# Altium PCB PMOD_DPOT.PcbDoc
Units mm, origin at the board's own origin, x right, y up, seen from the top; angles counter-clockwise.
Board outline 30 x 20 mm, 2 copper layers (Top Layer, Bottom Layer); 7 components, 8 nets, 26 pads, 1 vias.
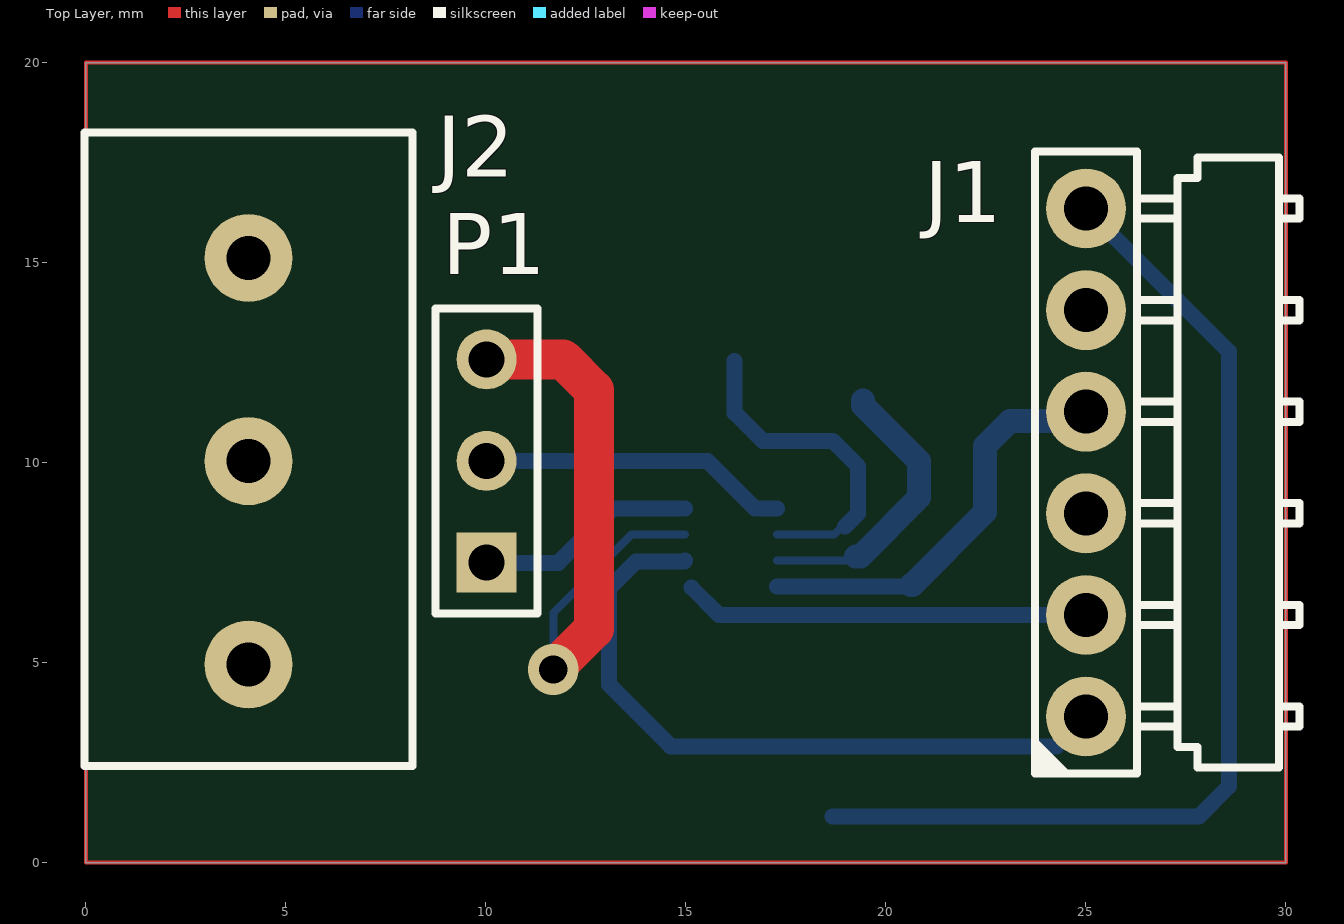
[diagram p0: Top Layer view]
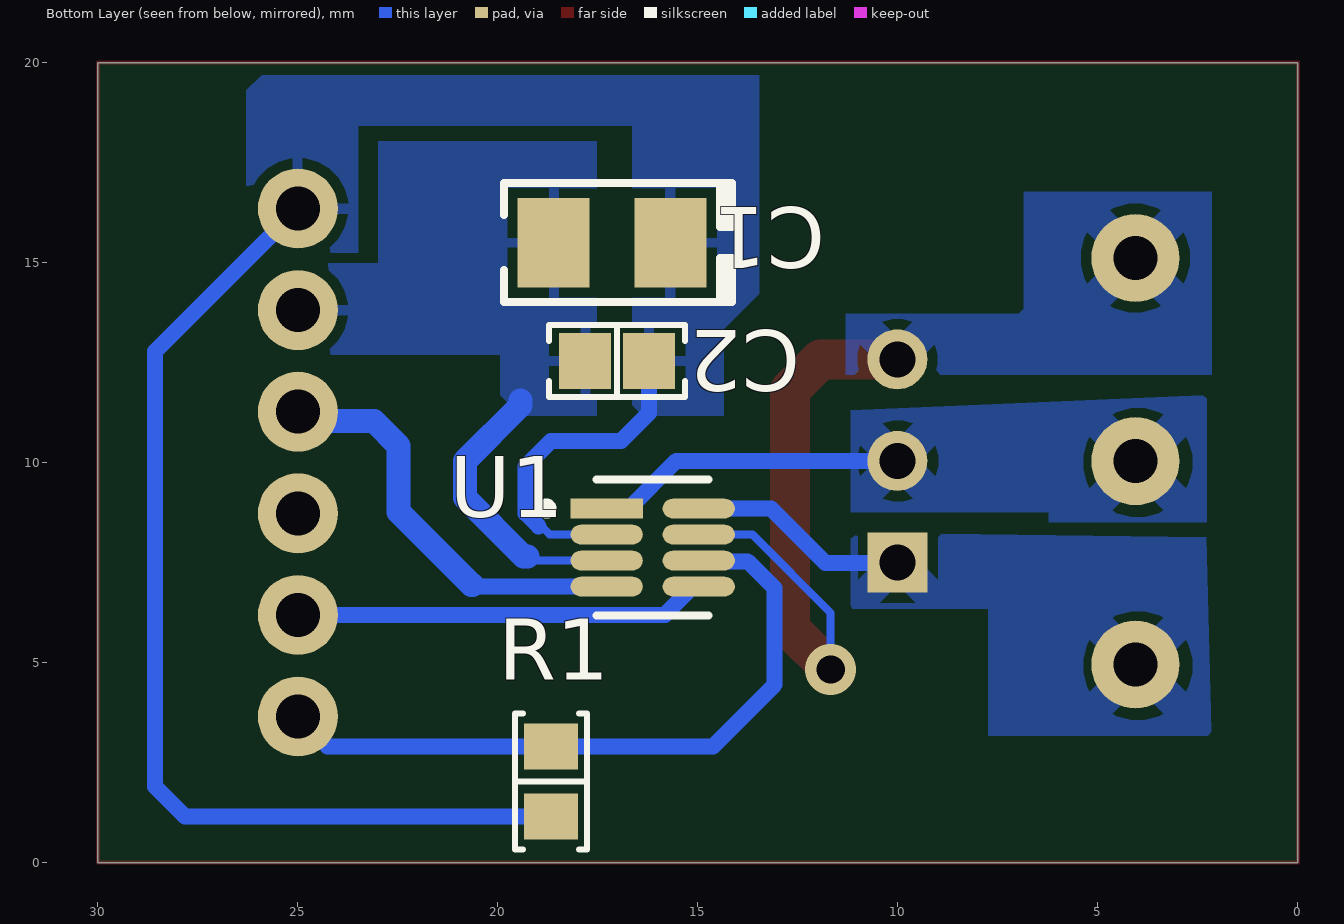
[diagram p1: Bottom Layer view, seen from below]
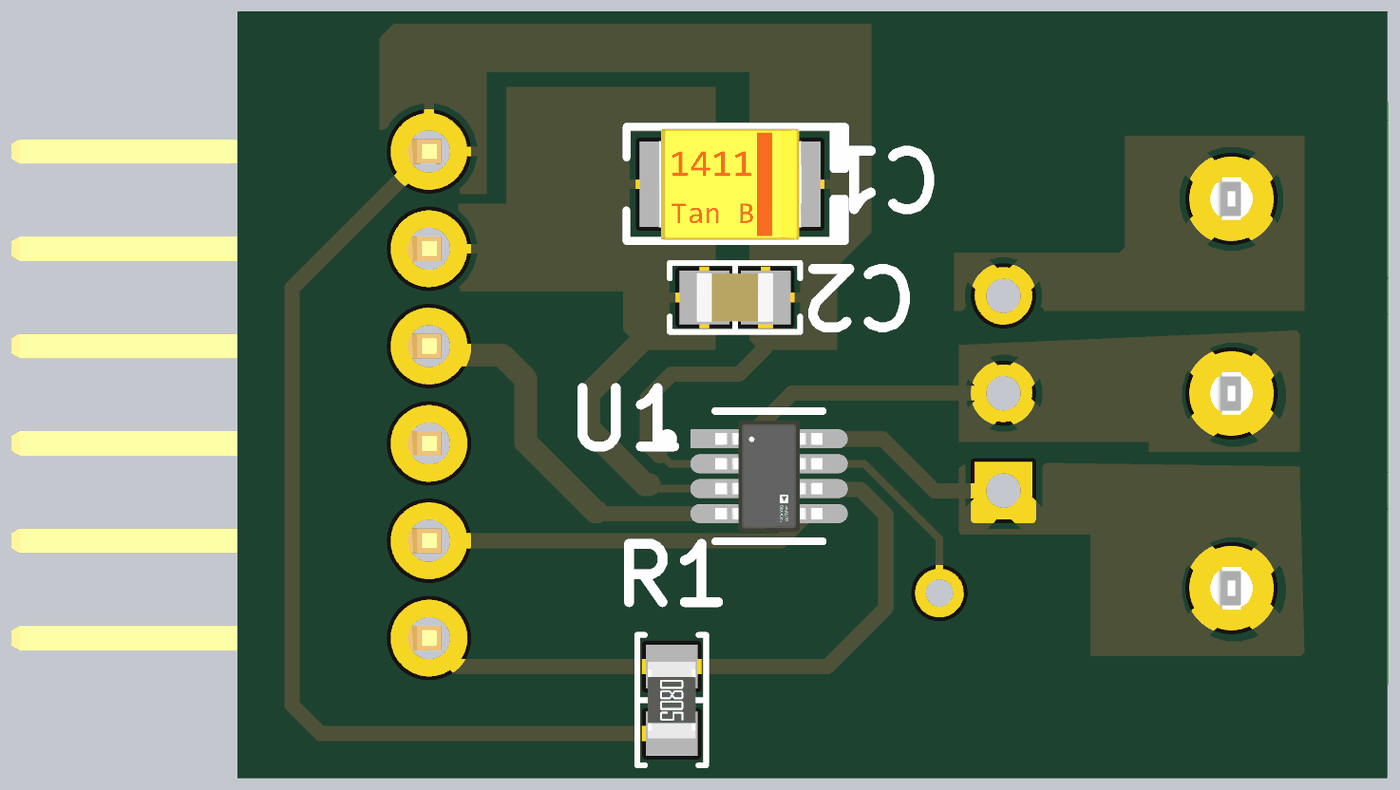
[diagram p2: 3D render of the assembled board from below, using the file's embedded part models]

## Layer stack, top to bottom
Top Solder: solder mask 0.0102, Solder Resist, Dk 3.5
Top Layer: signal copper 0.0356
Dielectric 1: dielectric 0.32, FR-4, Dk 4.8
Bottom Layer: signal copper 0.0356
Bottom Solder: solder mask 0.0102, Solder Resist, Dk 3.5

## Board outline
0,0 0,20 30,20 30,0

## Design rules (kind name [scope] priority, off if disabled: settings)
Clearance [All] p1: gap=0.254 ignorepadtopadclearanceinfootprint=FALSE except(0: Arc-Hole Track-Hole SMDPad-Hole THPad-Hole Via-Hole Fill-Hole Poly-Hole Region-Hole Text-Hole; 0.1: Arc-SMDPad Track-SMDPad SMDPad-SMDPad)
PlaneClearance [All] p1: clearance=0.254
PolygonConnect [All] p1: connectstyle=Relief reliefconductorwidth=0.8 reliefentries=4 polygonreliefangle="45 Angle" airgapwidth=0.254
RoutingVias [All] p1: holewidth=0.711 width=1.27 viastyle="Through Hole" minholewidth=0.711 minwidth=1.27 maxholewidth=0.711 maxwidth=1.27
SolderMaskExpansion [All] p1: expansion=0.102 istentingtop=FALSE
UnRoutedNet [All] p1: checkbadconnections=TRUE
Width [All] p1: maxlimit=1 minlimit=0.1 preferedwidth=0.6
28 further rules are at their usual default settings.

## Components (designator, comment, footprint, x,y, rotation, side; value= is the part's Value field where it differs from the comment)
C1 "10 µF" "CAP POL 1411_3528" 17.145,15.494 r0 bottom
C2 "0.1uF" "CAP 0805_2012" 17.018,12.54 r0 bottom value="10 µF"
J1 "M20-9960645" "HARWIN M20-9960645" 25,10 r90 top
J2 "282837-3" "TE 282837-3" 4.064,10.033 r90 top
P1 "Header 3" HDR1X3 10.013,7.5 r90 top
R1 "10 kOhms" "RES 0805_2012" 18.669,2.032 r270 bottom
U1 "AD5160BRJZ10-RL7" FP-RJ-8-IPC_A 16.129,7.874 r180 bottom (schematic designator U?)

## Footprints (in the part's own frame and the unit in brackets; to place one, negate y for a bottom-side part, rotate by r counter-clockwise, add the part's x,y. Pads: shape width x height; smd on the part's side, far side on the other; paste and mask are expansions set on the pad)
"CAP 0805_2012" [mm] "Chip Capacitor, 2-Leads, Body 2.00x1.20mm, IPC Medium Density"
  rect 1.3x1.4 smd: 1(-0.8,0) 2(0.8,0)
  silkscreen extent -1.7,-0.9 1.7,0.9, body extent -1,-0.64 1,0.64, height 1.26
"CAP POL 1411_3528" [mm] "Molded Capacitor, 2-Leads, Body 3.50x2.80mm, IPC Medium Density"
  rect 1.8x2.23 smd: 1(-1.46,0) 2(1.46,0)
  silkscreen extent -3,-1.5 2.71,1.48, body extent -1.87,-1.45 1.87,1.45, height 2
FP-RJ-8-IPC_A [mm]
  rect 1.805x0.495 smd paste+0 mask+0: 1(-1.15,0.975)
  rrect100% 1.805x0.495 smd paste+0 mask+0: 2(-1.15,0.325) 3(-1.15,-0.325) 4(-1.15,-0.975) 5(1.15,-0.975) 6(1.15,-0.325) 7(1.15,0.325) 8(1.15,0.975)
  silkscreen extent -2.78,-1.7 1.4,1.7, body extent -1.4,-1.45 1.4,1.45, height 1.45
"HARWIN M20-9960645" [mm] "2.54mm DIL PC TAIL PIN HEADER ASSEMBLY"
  round 2 hole 1.1: 1(-6.35,0) 2(-3.81,0) 3(-1.27,0) 4(1.27,0) 5(3.81,0) 6(6.35,0)
  silkscreen extent -7.78,-5.33 7.78,1.3, body extent -7.62,-10.9 7.62,0.32, height 2.54
HDR1X3 [mm] "Connector; Header; 3 Position"
  rect 1.5x1.5 hole 0.9: 1(0,0)
  round 1.5 hole 0.9: 2(2.54,0) 3(5.08,0)
  silkscreen extent -1.27,-1.27 6.35,1.27
"RES 0805_2012" [mm] "Chip Resistor, 2-Leads, Body 2.00x1.25mm, IPC Medium Density"
  rect 1.15x1.35 smd: 1(-0.875,0) 2(0.875,0)
  silkscreen extent -1.7,-0.9 1.7,0.9, body extent -1,-0.62 1,0.63, height 0.6
"TE 282837-3" [mm] "Wire to Board Terminal Block Horizontal with Board, 3 Postions, Body 15.84x8.2mm, Pitch 5.08mm"
  round 2.2 hole 1.1: 1(-5.08,0) 2(0,0) 3(5.08,0)
  silkscreen extent -7.62,-4.1 8.22,4.1, body extent -7.62,-4.1 8.22,4.1, height 10.3

## Part data
C1: library part TMCRB1C106MTRF, "CAP TANT 10UF 20% 16V 1411", Part Number=TMCRB1C106MTRF
C2: library part C2012X7R0J106K125AB, "CAP CER 10UF 6.3V X7R 0805", Part Number=C2012X7R0J106K125AB
J1: "CONN HEADER R/A 6POS 2.54MM", Part Number=M20-9960645
J2: "TERM BLK 3P SIDE ENT 5.08MM PCB", Part Number=282837-3
P1: "Header, 3-Pin", LatestRevisionDate=17-Jul-2002, LatestRevisionNote="Re-released for DXP Platform.", Publisher="Altium Limited"
R1: library part TNPU080510K0AWEN00, "TNPU0805 10K 0.05% 2PPM E52 E3", Part Number=TNPU080510K0AWEN00
U1: library part CMP-09083-000016-1, "IC DGT POT 10KOHM 256TAP SOT23-8", Case/Package=SOT-23, Frequency=25MHz, Max Operating Temperature=125°C, Max Supply Current=3uA, Max Supply Voltage=5.5V, Min Operating Temperature=-40°C, Min Supply Voltage=2.7V, Package Quantity=1, Resistance=10kR, Resistance Tolerance=15%, Temperature Coefficient=35ppm/°C, -3db Bandwidth=1.2MHz, Contact Plating=Gold, Lead Free="Contains Lead", Memory Type=Volatile, Mount="Surface Mount", Nominal Supply Current=3uA, Number of Channels=1, Number of Circuits=1, Number of Elements=1, Number of Pins=8, Number of Positions=256, Number of Taps=256, Operating Supply Current=3uA, Operating Supply Voltage=5.5V, packaging="Tape and Reel", Quiescent Current=3uA, Radiation Hardening=No, REACH SVHC="No SVHC", RoHS Compliant=Yes, series=-, Supply Current=3uA, Taper=Linear, Termination=SMD/SMT, Tolerance=15%, Interface=SPI

## Via types
v1: diameter 1.27, hole 0.711, Top Layer to Bottom Layer, 1 vias

## Nets (pads, with @x,y where several pads share a name; then routed paths per layer and width w, separated by ;. In a path a pad name is that pad's centre, name@x,y a point inside that pad or via, vN(x,y) a via of type N, cw(c..) or ccw(c..) an arc to the next point about the centre after c; other vN are vias at no path point)
GND: C1.2 C2.2 J1.5 U1.3 | length 7.2
  Bottom Layer w0.2: U1.3 19.254,7.549
  Bottom Layer w0.6: 19.254,7.653 19.358,7.653 20.828,9.123 20.828,10.033 19.431,11.43 19.431,11.557
NetJ1_1: J1.1 R1.1 U1.6 | length 17.5
  Bottom Layer w0.4: U1.6 14.96,7.531 13.754,7.531 13.081,6.858 13.081,4.445 14.619,2.907 R1.1 24.257,2.907 J1.1
NetJ1_2: J1.2 U1.5 | length 10.1
  Bottom Layer w0.4: U1.5@15.138,6.876 15.823,6.19 J1.2
NetJ1_4: J1.4 U1.4 | length 10.5
  Bottom Layer w0.4: U1.4 20.629,6.899
  Bottom Layer w0.6: 20.629,6.944 20.66,6.944 22.479,8.763 22.479,10.414 23.1,11.035 24.765,11.035 J1.4
NetJ2_1: J2.1 P1.1 U1.8 | length 5.5
  Bottom Layer w0.4: P1.1@10,7.5 10.007,7.493 11.811,7.493 13.167,8.849 U1.8
NetJ2_2: J2.2 P1.2 U1.1 | length 7.8
  Bottom Layer w0.4: P1.2@10,10.04 15.537,10.04 16.728,8.849 U1.1
NetJ2_3: J2.3 P1.3 U1.7 | length 15.9
  Top Layer w1: P1.3 11.931,12.58 12.7,11.811 12.7,5.842 v1(11.684,4.826)
  Bottom Layer w0.2: v1(11.684,4.826) 11.684,6.244 13.639,8.199 U1.7
VCC: C1.1 C2.1 J1.6 R1.2 U1.2 | length 34.5
  Bottom Layer w0.2: U1.2 18.705,8.199 18.946,8.44
  Bottom Layer w0.4: C2.1 16.218,11.242 16.919,10.541 18.669,10.541 19.304,9.906 19.304,8.731 18.98,8.407 ; R1.2 27.827,1.157 28.575,1.905 28.575,12.775 J1.6
pads on no net: J1.3
copper on no net: | length 100
  Top Layer w0.1: 0,0 30,0 30,20 0,20 0,0

## Polygon pours and split planes (outlines as drawn)
NetJ2_3 on Bottom Layer "NETJ2_3_L02_P004" (solid, remove dead copper, pour order 4): 2.159,16.129 2.159,16.002 2.159,12.192 11.303,12.192 11.303,13.716 6.985,13.716 6.858,13.843 6.858,16.764 2.159,16.764
NetJ2_2 on Bottom Layer "NETJ2_2_L02_P003" (solid, remove dead copper, pour order 3): 2.281,11.684 2.281,8.509 6.223,8.509 6.223,8.763 11.176,8.763 11.176,9.271 11.176,11.303
NetJ2_1 on Bottom Layer "NETJ2_1_L02_P002" (solid, remove dead copper, pour order 2): 2.159,3.175 7.747,3.175 7.747,6.35 11.303,6.35 11.176,6.477 11.176,8.255 2.286,8.128
GND on Bottom Layer "GND_L02_P001" (solid, remove dead copper, pour order 1): 26.289,14.986 22.987,14.986 22.987,18.034 17.526,18.034 17.526,16.891 17.526,11.176 18.923,11.176 19.431,11.176 19.939,11.684 19.939,12.7 26.289,12.7
VCC on Bottom Layer "VCC_L02_P000" (solid, remove dead copper, pour order 0): 23.495,15.24 26.289,15.24 26.289,19.304 25.908,19.685 13.462,19.685 13.462,14.224 14.351,13.335 14.351,11.176 16.129,11.176 16.256,11.049 16.637,11.43 16.637,18.415 23.495,18.415